# Altium PCB 底盘电源板.PcbDoc
Units mil, origin at the board's own origin, x right, y up, seen from the top; angles counter-clockwise.
Board outline 2868.7 x 2095.1 mil, 2 copper layers (Top Layer, Bottom Layer); 41 components, 17 nets, 99 pads, 8 vias.
Unrouted connection lines stored in the file: 32.
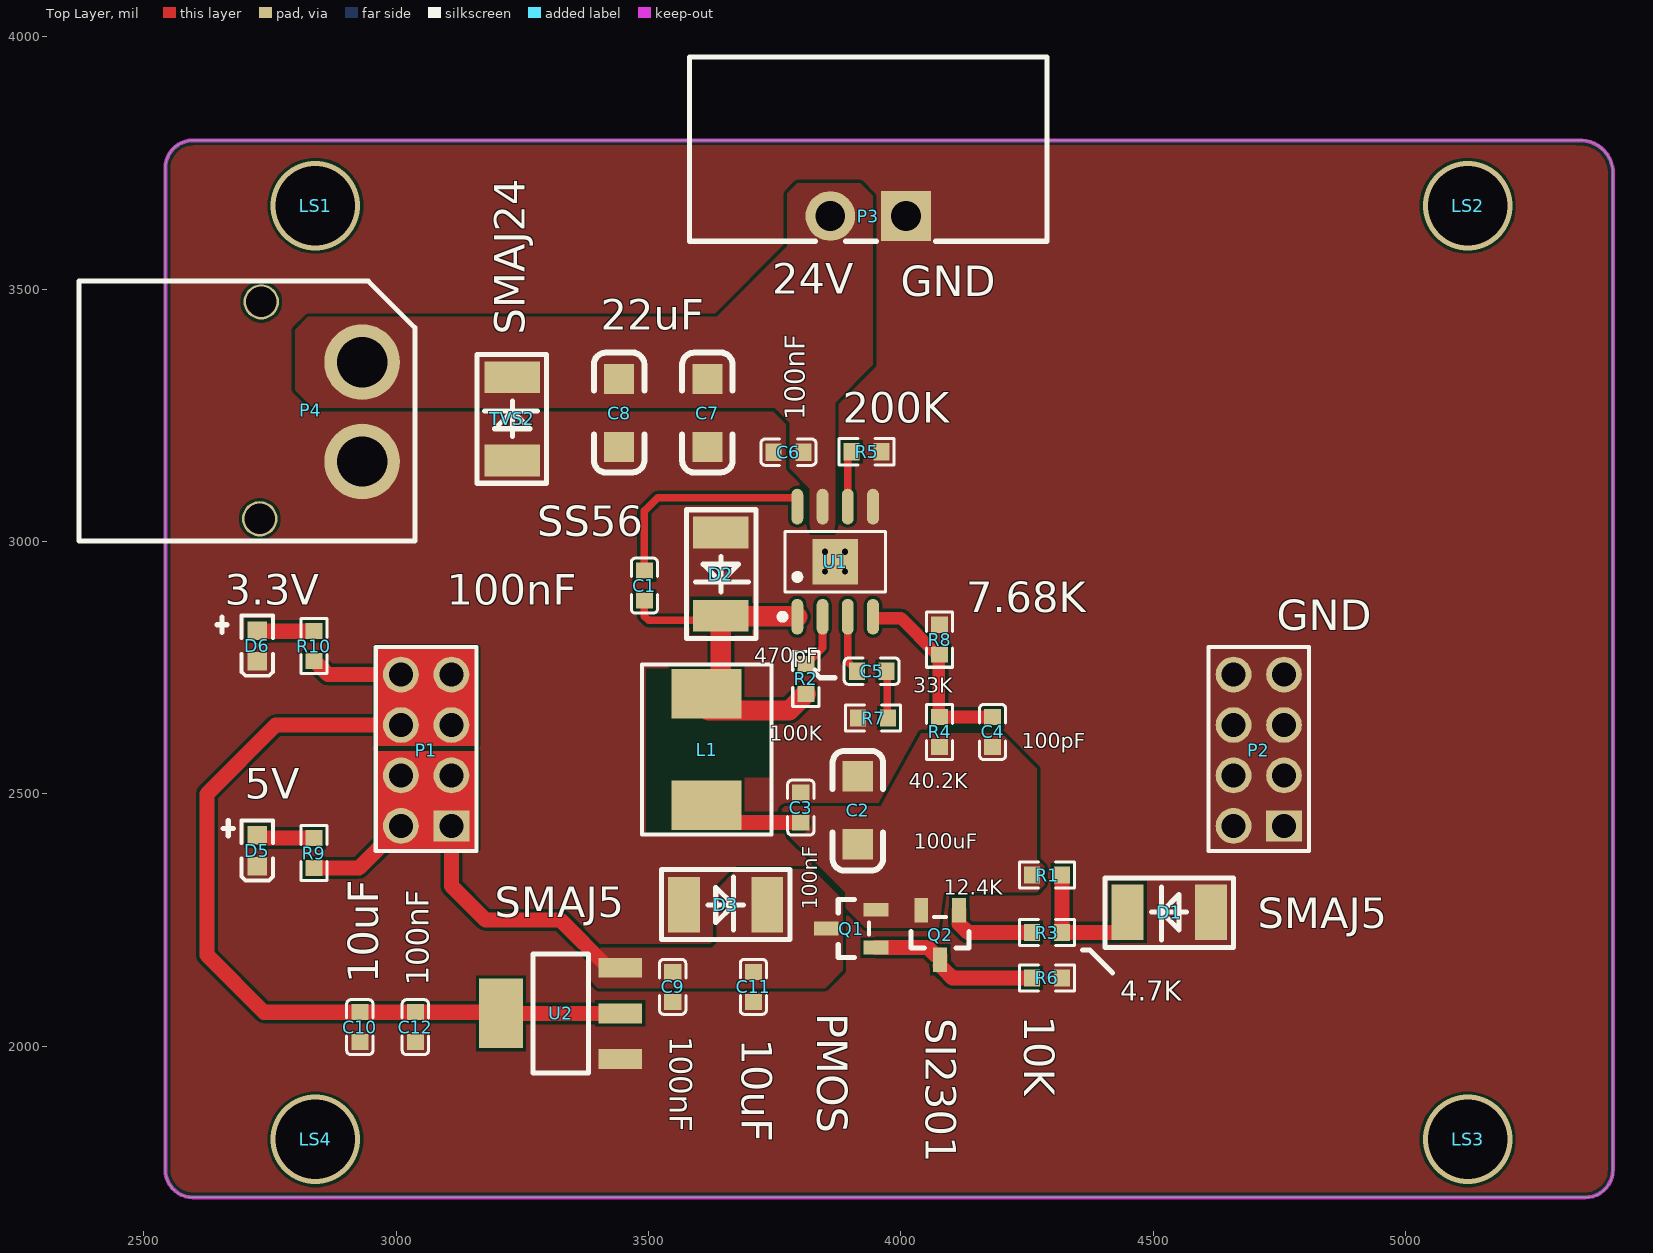
[diagram p0: Top Layer view]
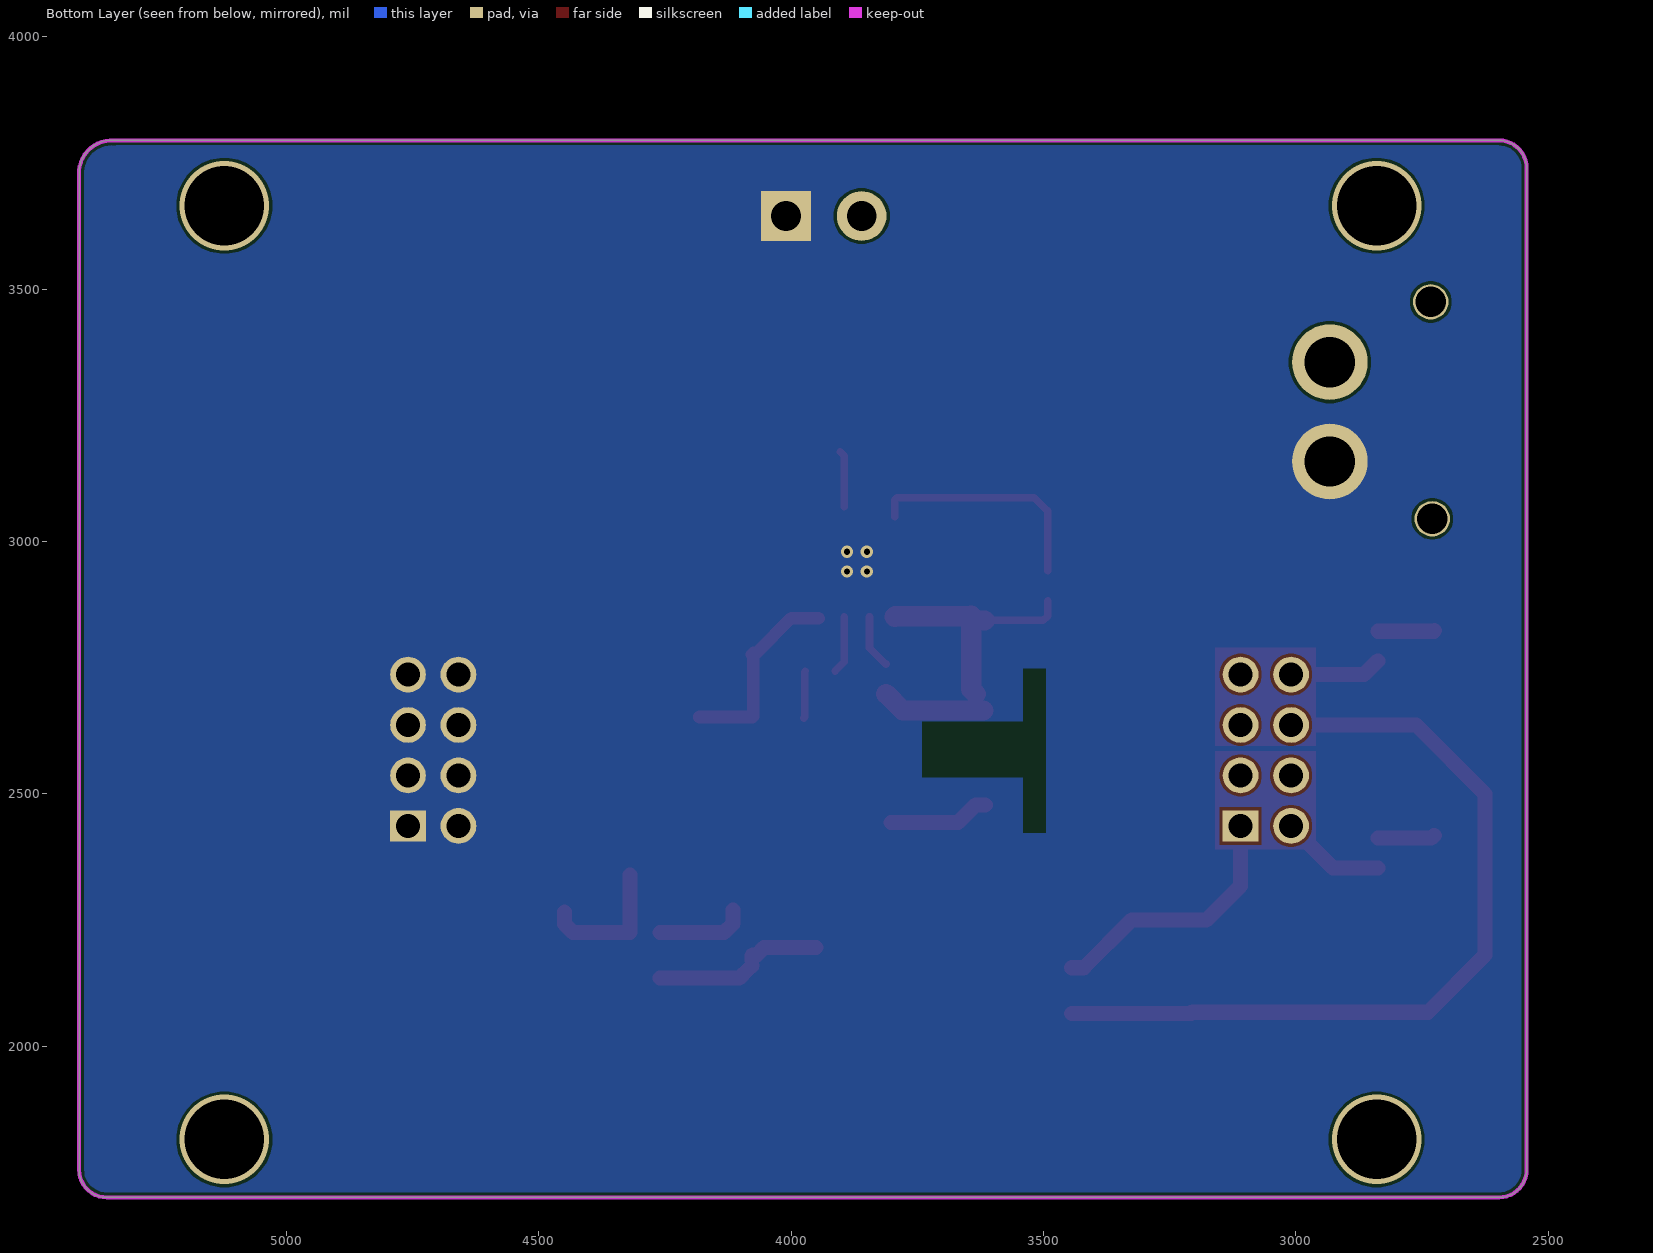
[diagram p1: Bottom Layer view, seen from below]

## Layer stack, top to bottom
Top Solder: solder mask 0.4, Solder Resist, Dk 3.5
Top Layer: signal copper 1.4
Dielectric 1: dielectric 12.6, FR-4, Dk 4.8
Bottom Layer: signal copper 1.4
Bottom Solder: solder mask 0.4, Solder Resist, Dk 3.5

## Board outline
2542.67,1755 ccw(c2597.67,1755) 2597.67,1700 3259.52,1700 5356.37,1700 ccw(c5356.37,1755) 5411.37,1755 5411.37,3735 ccw(c5346.37,3730) 5341.37,3795 4099.52,3795 2597.67,3795 ccw(c2597.67,3740) 2542.67,3740

## Design rules (kind name [scope] priority, off if disabled: settings)
Clearance [All] p1: gap=6 ignorepadtopadclearanceinfootprint=FALSE
PlaneConnect [All] p1: planeconnectstyle=Direct reliefexpansion=20 reliefentries=4 reliefconductorwidth=10 reliefairgap=10
PolygonConnect [All] p1: connectstyle=Direct reliefconductorwidth=10 reliefentries=4 polygonreliefangle="90 Angle" airgapwidth=10
RoutingVias [All] p1: holewidth=12 width=24 viastyle="Through Hole" minholewidth=12 minwidth=24 maxholewidth=196.85 maxwidth=196.85
SilkToSilkClearance [All] p1: silktosilkclearance=2
SolderMaskExpansion [All] p1: expansion=4 istentingtop=FALSE
Width [All] p1: maxlimit=100 minlimit=10 preferedwidth=15
28 further rules are at their usual default settings.

## Components (designator, comment, footprint, x,y, rotation, side; value= is the part's Value field where it differs from the comment)
C1 "0603" C0603 3495,2915 r0 top
C2 "1206" C1206 3911.85,2467.15 r90 top value=100uF
C3 "0603" C0603 3805,2475 r0 top value=100nF
C4 "Cap" C0603 4185,2625 r0 top value=100pF
C5 "0603" C0603 3945,2740 r270 top value=470pF
C6 "0603" C0603 3775,3180 r90 top
C7 "1206" C1206 3620,3255 r270 top value=22uF
C8 "1206" C1206 3445,3255 r270 top value=22uF
C9 "104/0603/16V" C0603 3545,2115 r180 top
C10 "104/0603/16V" C0603 2925,2035 r180 top
C11 "10uF" C0603 3705,2115 r180 top
C12 "10uF" C0603 3035,2035 r180 top
D1 "TVS" SMAJ 4535,2245 r0 top
D2 "D-Schottky" SS56 3645,2945 r90 top
D3 "SMAJ5.0CA" SMAJ 3650,2300 r180 top
D5 "绿灯 0603" LED 2720,2380 r180 top
D6 "绿灯 0603" LED 2720,2785.92 r180 top
L1 "MHCI06030-6R8M-R8" L 3615,2595 r180 top value=47uH
LS1 "螺丝" 螺丝 2840,3665.39 r0 top
LS2 "螺丝" 螺丝 5123.46,3665.39 r0 top
LS3 "螺丝" 螺丝 5123.46,1815 r0 top
LS4 "螺丝" 螺丝 2840,1815 r0 top
P1 "排针排母" 6PIN 3064.52,2600 r0 top
P2 "排针排母" 6PIN 4714.52,2600 r0 top
P3 "3.81 2p绿色端子" 2PIN 3925,3790 r180 top
P4 "XT30" XT30 2720,3305 r0 top
Q1 "SI2301 2.3A ." PMOS 3915,2235 r0 top
Q2 "PMBT3906" PNP 4075,2215 r0 top
R1 "Res2" R0603 4297.43,2336.02 r270 top value=12.4k
R2 "0603" R0603 3815,2735 r0 top
R3 "Res2" R0603 4297.12,2221.98 r270 top value=4.7K
R4 "0603" R0603 4080,2630 r0 top value=40.2K
R5 "0603" R0603 3940,3175 r270 top
R6 "Res2" R0603 4297.12,2131.98 r270 top value=10K
R7 "0603" R0603 3937.88,2653.02 r90 top value=33K
R8 "0603" R0603 4080,2812.81 r0 top value=7.68K
R9 "10K" R0603 2840,2390 r0 top
R10 "1K" R0603 2840,2800 r0 top
TVS2 "SMAJ24CA" SMAJ 3210,3240 r270 top
U1 "FP6151" FP6151 3860.17,2964.09 r0 top
U2 "LM1117-3.3" 5-3.3 3335,2050 r0 top

## Footprints (in the part's own frame and the unit in brackets; to place one, negate y for a bottom-side part, rotate by r counter-clockwise, add the part's x,y. Pads: shape width x height; smd on the part's side, far side on the other; paste and mask are expansions set on the pad)
2PIN [mm]
  rect 2.5x2.5 hole 1.5: 1(-2.171,3.682)
  round 2.5 hole 1.5: 2(1.639,3.682)
  silkscreen extent -9.27,-4.32 8.73,4.95
5-3.3 [mm]
  rect 2.2x1 smd: 1(2.768,-1.927) 2(2.768,0.373) 3(2.768,2.673)
  rect 2.2x3.5 smd: 2(-3.232,0.373)
  silkscreen extent -1.63,-2.63 1.17,3.37, body extent -3.72,-2.87 3.26,3.62, height 1.64
6PIN [mm]
  rect 1.8x1.575 hole 1.2: 1(1.143,-4.157)
  round 1.8 hole 1.2: 2(1.143,-1.617) 3(1.143,0.923) 4(1.143,3.463) 5(-1.397,3.463) 6(-1.397,0.923) 7(-1.397,-1.617) 8(-1.397,-4.157)
  silkscreen extent -2.67,-5.43 2.41,4.86
C0603 [mil]
  rect 34.02x31.75 smd: 1(-3.02,27.19) 2(-3.02,-32.12)
  silkscreen extent -29,-57 23,52
C1206 [mil]
  rect 60x60 smd: 1(67.85,-3.15) 2(-67.15,-3.15)
  silkscreen extent -119,-53 118,47, body extent -62,-35 64,28, height 39
FP6151 [mm]
  oval 0.6x1.8 smd: 1(-1.655,-2.876) 2(-0.385,-2.876) 3(0.885,-2.876) 4(2.155,-2.876) 5(2.155,2.669) 6(0.885,2.669) 7(-0.385,2.669) 8(-1.655,2.669)
  rect 2.29x2.29 smd: 9(0.25,-0.104)
  silkscreen extent -2.55,-3.03 2.78,1.42
L [mm]
  rect 3.5x2.5 smd: 1(-0.002,2.984) 2(-0.002,-2.616)
  silkscreen extent -3.28,-4.1 3.25,4.46
LED [mm]
  rect 0.98x0.93 smd: A(-0.124,-0.95) K(-0.124,0.59)
  silkscreen extent -0.91,-1.71 0.67,1.32, body extent -0.52,-0.98 0.28,0.62, height 0.6
PMOS [mm]
  rect 1.25x0.7 smd: 1(0.913,-1.008) 2(0.913,0.892) 3(-1.587,-0.058)
  silkscreen extent -0.99,-1.52 0.56,1.4, body extent -1.84,-1.56 1.16,1.44, height 1.3
PNP [mm]
  rect 0.7x1.25 smd: 1(1.029,1.381) 2(-0.871,1.381) 3(0.079,-1.119)
  silkscreen extent -1.38,-0.52 1.54,1.03, body extent -1.42,-1.37 1.58,1.63, height 1.3
R0603 [mil]
  rect 34.02x31.75 smd: 1(-3.02,22.19) 2(-3.02,-37.12)
  silkscreen extent -29,-62 23,47
SMAJ [mil]
  rect 63x110 smd: 1(79.59,20.38) 2(-85.41,20.38)
  silkscreen extent -130,-50 125,88, body extent -94,-33 87,74, height 94
SS56 [mil]
  rect 63x110 smd: 1(72.89,1.62) 2(-92.11,1.62)
  silkscreen extent -137,-68 118,70, body extent -101,-51 80,55, height 94
XT30 [mil]
  round 150 hole 100: 1(212.64,50.43) 2(212.64,-146.43)
  round 70 hole 60: 3(9.64,-260) 4(12.64,170)
  silkscreen extent -348,-304 317,211, body extent -341,-310 245,214, height 197
螺丝 [mil]

## Part data
C1 C2 C3 C5 C6 C7 C8: library part Cap, "Capacitor", LatestRevisionDate=17-Jul-2002, LatestRevisionNote="Re-released for DXP Platform.", PackageDescription="Radial Cap, Thru-Hole; 2 Leads; 0.3 in Pin Spacing", PackageReference=RAD-0.3, Published=8-Jun-2000, Publisher="Altium Limited"
  C1 C6: 0603=100nF
C4: "Capacitor", LatestRevisionDate=17-Jul-2002, LatestRevisionNote="Re-released for DXP Platform.", PackageDescription="Radial Cap, Thru-Hole; 2 Leads; 0.3 in Pin Spacing", PackageReference=RAD-0.3, Published=8-Jun-2000, Publisher="Altium Limited"
C9 C10: library part CAP
C11 C12: library part C
D1: library part "D Zener", "Zener Diode", LatestRevisionDate=17-Jul-2002, LatestRevisionNote="Re-released for DXP Platform.", PackageDescription="Diode, Thru-Hole; 2 Leads; 0.7 in Pin Spacing", PackageReference=DIODE-0.7, Published=8-Jun-2000, Publisher="Altium Limited"
D2: "肖特基二极管", Code_JEDEC=DO-214-AA, LatestRevisionDate=17-Jul-2002, LatestRevisionNote="Re-released for DXP Platform.", PackageReference=SMB, Published=8-Jun-2000, Publisher="Altium Limited", Type=SS56
D3 TVS2: library part TVS
D5 D6: library part "0603 绿灯", "发光二极管", Package=0603, SuppliersPartNumber=C72043, ComponentLink1Description=供应商链接, ComponentLink1URL=http://www.szlcsc.com/product/details_73152.html, Supplier=LC
L1: library part Inductor, "Inductor", Code_IEC=1005, Code_JEITA=0402, LatestRevisionDate=29-May-2009, LatestRevisionNote="IPC-7351 Footprint Added.", PackageDescription="Chip Inductor", PackageReference=0402-A, Published=8-Jun-2000, Publisher="Altium Limited"
P4: library part PH2.0-2A, LatestRevisionDate=17-Jul-2002, LatestRevisionNote="Re-released for DXP Platform.", Publisher="Altium Limited"
Q1: library part PMOS-2, "P-Channel Power MOSFET", ComponentLink1Description="Manufacturer Link", ComponentLink1URL=http://www.irf.com/, DatasheetVersion=PD-9.390D, LatestRevisionDate=17-Jul-2002, LatestRevisionNote="Re-released for DXP Platform.", Note="Pin 4 not drawn and electrically connected to Pin 2.", PackageDescription="TO, Thru-Hole, Vertical, Heatsink Mounted; 3 In-Line Leads; Pitch 2.54 mm", PackageReference=TO-220AB, PackageVersion=Feb-1997, Published=8-Jun-2000, Publisher="Altium Limited"
Q2: library part PNP, "PNP Bipolar Transistor", LatestRevisionDate=29-May-2009, LatestRevisionNote="IPC-7351 Footprint Added.", PackageDescription="3-Pin SOT-23 Package 0.95 mm Pitch, 2.4 mm Lead Span", PackageReference=SOT-23B, PackageVersion=Aug-1999, Published=8-Jun-2000, Publisher="Altium Limited"
R1 R3 R6: "Resistor", LatestRevisionDate=17-Jul-2002, LatestRevisionNote="Re-released for DXP Platform.", PackageDescription="Axial Device, Thru-Hole; 2 Leads; 0.4 in Pin Spacing", PackageReference=AXIAL-0.4, Published=8-Jun-2000, Publisher="Altium Limited"
R2 R4 R5 R7 R8: library part Res2, "Resistor", LatestRevisionDate=17-Jul-2002, LatestRevisionNote="Re-released for DXP Platform.", PackageDescription="Axial Device, Thru-Hole; 2 Leads; 0.4 in Pin Spacing", PackageReference=AXIAL-0.4, Published=8-Jun-2000, Publisher="Altium Limited"
  R2: 0603=100K
  R5: 0603=200K
R9 R10: library part R

## Via types
v1: diameter 24, hole 12, Top Layer to Bottom Layer, 4 vias
v2: diameter 177.17, hole 157.48, Top Layer to Bottom Layer, tented both sides, 4 vias

## Nets (pads, with @x,y where several pads share a name; then routed paths per layer and width w, separated by ;. In a path a pad name is that pad's centre, name@x,y a point inside that pad or via, vN(x,y) a via of type N, cw(c..) or ccw(c..) an arc to the next point about the centre after c; other vN are vias at no path point)
5V: C2.2 C3.2 C4.2 L1.1 Q1.2 Q2.2 R1.2 R4.2 | length 201.3
  Top Layer w30: L1.1 3634.75,2477.53 3669.4,2442.88 C3.2
5V-O: C9.2 C11.2 D3.2 P1.1 P1.2 P1.7 P1.8 Q1.3 R9.2 U2.3 | length 732.1
  Top Layer w30: R9.2 2926.06,2352.88 P1.8 ; P1.1@3113.95,2436.34 P1.1 3109.52,2317.37 3176.89,2250 3325.59,2250 3420.37,2155.23 U2.3
24V: C6.2 C7.2 C8.2 P3.2 P4.1 TVS2.2 U1.7
GND: C2.1 C3.1 C6.1 C7.1 C8.1 C9.1 C10.1 C11.1 C12.1 D1.1 D2.1 D3.1 D5.K D6.K P2.1 P2.2 P2.3 P2.4 P2.5 P2.6 P2.7 P2.8 P3.1 P4.2 R5.1 R6.1 R7.1 R8.1 TVS2.1 U1.5 U1.9 U2.1
  other v1: 3850.32,2940.31 3889.69,2940.31 3850.32,2979.68 3889.69,2979.68
NetC1_1: C1.1 U1.8 | length 467.4
  Top Layer w15: C1.1 3491.98,3060.41 3518.34,3086.76 3791.02,3086.76 3795,3082.78 U1.8@3795,3049.15
NetC1_2: C1.2 D2.2 L1.2 R2.2 U1.1 | length 723.6
  Top Layer w15: C1.2 3491.98,2852.32 3500.77,2843.53 3616.45,2843.53 3625.82,2852.89 D2.2
  Top Layer w40: D2.2@3616.45,2843.53 3641.25,2843.53 3643.38,2841.39 3643.38,2706.99 L1.2@3634.39,2698 ; L1.2@3618.9,2665 3779.1,2665 R2.2 ; D2.2 3644.41,2851.87 3786.81,2851.87 3793.98,2851.87 U1.1
NetC4_1: C4.1 R4.1 R8.2 U1.4 | length 393.8
  Top Layer w25: U1.4@3945.69,2848.04 4000.09,2848.04 4069.07,2779.07 4074.67,2779.07 R8.2@4078.04,2775.69 ; R8.2 R8.2@4078.04,2775.69 ; C4.1 R4.1 4075.15,2654.02 4075.15,2772.8 R8.2@4078.04,2775.69
NetC5_1: C5.1 R7.2 | length 94.2
  Top Layer w15: C5.1 3973.6,2741.61 3973.6,2651.4 R7.2
NetC5_2: C5.2 U1.3 | length 115.2
  Top Layer w15: U1.3 3895,2762.03 3912.88,2744.15 C5.2
NetD1_2: D1.2 R1.1 R3.1 | length 274.9
  Top Layer w30: R1.1 4319.31,2338.72 R3.1 4432.71,2225 4449.59,2241.88 D1.2
NetD5_A: D5.A R9.1 | length 114.3
  Top Layer w30: D5.A 2725.85,2417.39 2731.05,2412.19 R9.1
NetD6_A: D6.A R10.1 | length 112.6
  Top Layer w30: D6.A 2725.98,2822.19 R10.1
NetQ1_1: Q1.1 Q2.3 R6.2 | length 333.9
  Top Layer w30: Q1.1 4053.73,2195.32 4068.49,2180.55 4076.88,2180.55 4078.1,2179.33 Q2.3 ; Q2.3@4078.25,2159.18 4097.11,2140.32 4102.43,2135 R6.2
NetQ2_1: Q2.1 R3.2 | length 178.6
  Top Layer w30: Q2.1 4115.5,2242.57 4133.07,2225 R3.2
NetR2_1: R2.1 U1.2 | length 108
  Top Layer w15: R2.1 3813.12,2757.19 3845,2789.07 U1.2
NetR5_2: R5.2 U1.6 | length 112.1
  Top Layer w15: U1.6 3895,3170.14 R5.2
V3.3: C10.2 C12.2 P1.3 P1.4 P1.5 P1.6 R10.2 U2.2 | length 1811.4
  Top Layer w30: R10.2 2838.12,2762.88 2864.66,2736.34 P1.5 ; P1.6 2761.34,2636.34 2624.81,2499.81 2624.81,2180.19 2737.88,2067.12 C10.2 C12.2 3205.32,2067.12 3207.77,2064.68 U2.2@3443.99,2064.68
pads on no net: P4.3 P4.4
copper on no net:
  other v2: 2840,1815 5123.46,1815 2840,3665.39 5123.46,3665.39

## Polygon pours and split planes (outlines as drawn)
GND on Top Layer "GND_L01_P013" (solid, remove dead copper, pour order 13): 2542.67,1755 ccw(c2597.67,1755) 2597.67,1700 3259.52,1700 5356.37,1700 ccw(c5356.37,1755) 5411.37,1755 5411.37,3735 ccw(c5346.37,3730) 5341.37,3795 4099.52,3795 2597.67,3795 ccw(c2597.67,3740) 2542.67,3740
5V on Top Layer "Top Layer-5V" (solid, remove dead copper, pour order 12): 3890,2275 3930,2235 4039,2235 4075,2235 4085,2305 4270,2305 4285,2320 4285,2355 4270,2370 4270,2550 4200,2620 4040.34,2620 3960,2475 3770,2475 3760,2465 3760,2435 3825,2370 3890,2305
24V on Top Layer "24V_L01_P000" (solid, remove dead copper, pour order 0): 2800,3420 2825,3445 3635,3445 3775,3585 3775,3690 3795,3710 3920,3710 3945,3685 3945,3350 3870,3275 3870,3035 3867,3020 3823,3020 3820,3035 3820,3105 3780,3145 3780,3235 3750,3265 2835,3265 2800,3300
5V-O on Top Layer "5V-O_L01_P006" (solid, remove dead copper, pour order 6): 3885,2290 3825,2350 3675,2350 3635,2310 3635,2205 3625,2195 3405,2195 3385,2175 3385,2130 3400,2115 3850.38,2115 3885,2150 3885,2151.88
GND on Bottom Layer "GND_L02_P008" (solid, remove dead copper, pour order 8): 2542.67,1755 ccw(c2597.67,1755) 2597.67,1700 3259.52,1700 5356.37,1700 ccw(c5356.37,1755) 5411.37,1755 5411.37,3735 ccw(c5346.37,3730) 5341.37,3795 4099.52,3795 2597.67,3795 ccw(c2597.67,3740) 2542.67,3740

## Keep-outs
Keep-Out Layer:
  lines w7.87: 2542.67,1755 2542.67,3740 ; 2597.67,1700 3259.52,1700 4189.52,1700 5356.37,1700 ; 2597.67,3795 4099.52,3795 5341.37,3795 ; 5411.37,1755 5411.37,3735
  lines w8: 2542.67,1755 ccw(c2597.67,1755) 2597.67,1700 ; 2542.67,3740 cw(c2597.67,3740) 2597.67,3795 ; 5341.37,3795 cw(c5346.37,3730) 5411.37,3735 ; 5356.37,1700 ccw(c5356.37,1755) 5411.37,1755

## Other copper
Top Layer:
  rectangle net 5V-O: 2960,2390 3160,2585
  rectangle net V3.3: 2960,2595 3160,2790
  pour cut-out: 3495.17,2747.79 3540.17,2747.79 3540.17,2642.79 3740.17,2642.79 3740.17,2532.79 3540.17,2532.79 3540.17,2422.79 3495.17,2422.79
Bottom Layer:
  pour cut-out: 3495.17,2747.79 3540.17,2747.79 3540.17,2642.79 3740.17,2642.79 3740.17,2532.79 3540.17,2532.79 3540.17,2422.79 3495.17,2422.79

## Silkscreen, mask and mechanical layers (free items; w line width, h text height)
Top Overlay:
  lines w10: 2645,2835 2665,2835 ; 2655,2820 2655,2850 ; 2657.2,2431.56 2677.2,2431.56 ; 2667.2,2416.56 2667.2,2446.56 ; 3830,2745 3830,2740 3840,2730 3870,2730 ; 4360,2190 4375,2190 4420,2145
  text "24V" at 3744.88,3490.92 h60
  text "GND" at 3999.88,3485.92 h60
  text "22uF" at 3405,3420 h60
  text "SMAJ24" at 3255,3410 h60 r90
  text "100nF" at 3810,3240 h40 r90
  text "200K" at 3885,3235 h60
  text "SS56" at 3280,3010 h60
  text "3.3V" at 2660,2875 h60
  text "100nF" at 3100,2875 h60
  text "7.68K" at 4130,2860 h60
  text "GND" at 4745.14,2823.98 h60
  text "470pF" at 3710,2760 h30
  text "33K" at 4025,2700 h30
  text "100K" at 3740,2605 h30
  text "100pF" at 4240,2590 h30
  text "40.2K" at 4016,2511 h30
  text "5V" at 2700,2490 h60
  text "100uF" at 4026,2391 h30
  text "12.4K" at 4085,2300 h30
  text "100nF" at 3835,2270 h30 r90
  text "SMAJ5" at 3195,2255 h60
  text "SMAJ5" at 4707.55,2233.14 h60
  text "10uF" at 2965,2125 h60 r90
  text "100nF" at 3065,2120 h45 r90
  text "4.7K" at 4435,2090 h40
  text "PMOS" at 3835,2065 h60 r270
  text "10K" at 4245,2060 h60 r270
  text "SI2301" at 4050,2055 h60 r270
  text "100nF" at 3541.86,2019.92 h45 r270
  text "10uF" at 3685,2015 h60 r270